# EAGLE board mowgli (EAGLE 7.6.0)
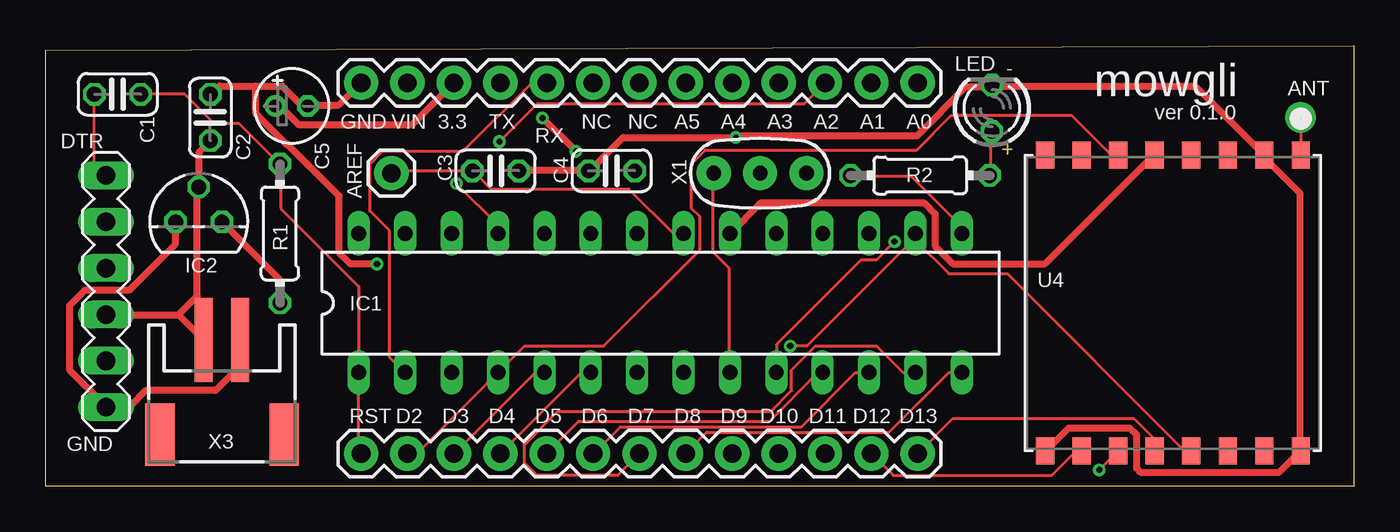
[diagram p0: board, top side]
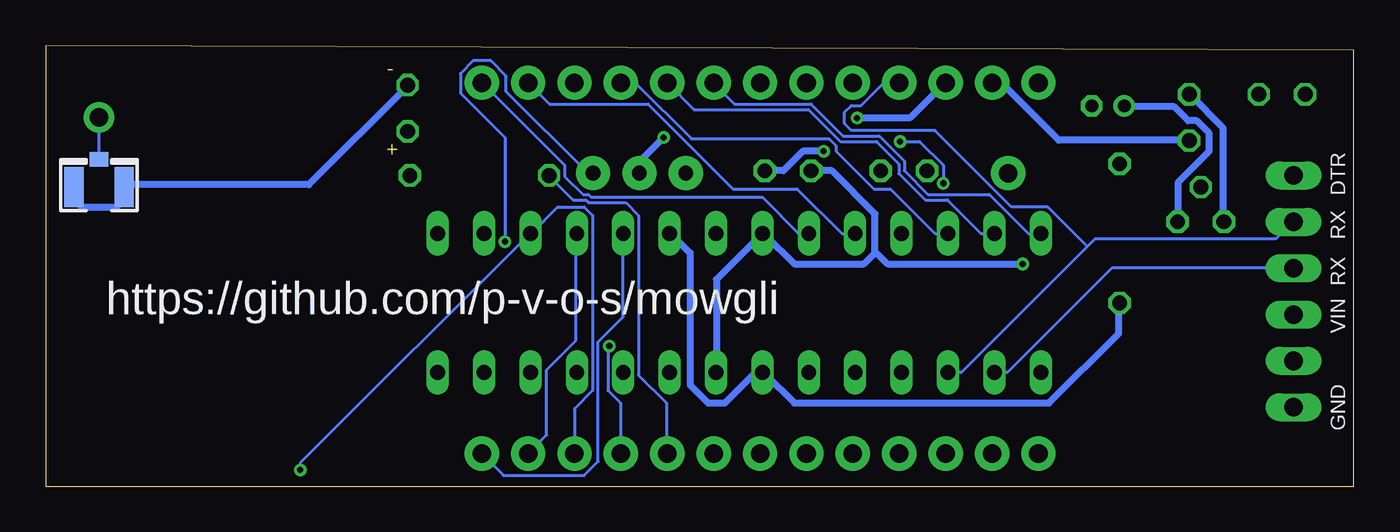
[diagram p1: board, bottom side, seen from below]

Size 71.63 x 24.13 mm. Coordinates in mm from the lower left corner, seen from the top.
Outline: 0,0 0,23.88 71.63,24.13 71.63,0 0,0
Copper layers (1*16): Top 0.0356mm / dielectric 1.5011mm / Bottom 0.0356mm
Design rules "LaenPCBOrder": minimum track width 6mil, minimum drill 13mil, track to track 6mil, track to pad 6mil, pad to pad 6mil, via to via 6mil, smd to smd 6mil, copper to edge 15mil, drill to drill 6mil, minimum pad ring 7mil, minimum via ring 7mil, stop-mask expansion 3mil, vias tented up to drill 0mil, thermal gap 10mil
Net classes: 1 power: width 0.381 mm, clearance 0.254 mm

## Footprints (pad centres in the part's own frame; a part is rotated, then mirrored left to right if it is on the bottom)
1X13 = drill 1.016 pad 1.88: 1 0,0; 2 2.54,0; 3 5.08,0; 4 7.62,0; 5 10.16,0; 6 12.7,0; 7 15.24,0; 8 17.78,0; 9 20.32,0; 10 22.86,0; 11 25.4,0; 12 27.94,0; 13 30.48,0
1X01_ROUND = drill 1 pad 1.676: 1 0,0
C025-024X044 = drill 0.813 octagon: 1 -1.27,0; 2 1.27,0
E1,8-4 = drill 0.711 pad 1.168: + -0.889,0 | drill 0.711 pad 1.168 octagon: - 0.889,0
MA06-1 = drill 1.016 long: 1 0,0; 2 2.54,0; 3 5.08,0; 4 7.62,0; 5 10.16,0; 6 12.7,0
DIL28-3 = drill 0.813 long: 1 -16.51,-3.81; 2 -13.97,-3.81; 3 -11.43,-3.81; 4 -8.89,-3.81; 5 -6.35,-3.81; 6 -3.81,-3.81; 7 -1.27,-3.81; 8 1.27,-3.81; 9 3.81,-3.81; 10 6.35,-3.81; 11 8.89,-3.81; 12 11.43,-3.81; 13 13.97,-3.81; 14 16.51,-3.81; 15 16.51,3.81; 16 13.97,3.81; 17 11.43,3.81; 18 8.89,3.81; 19 6.35,3.81; 20 3.81,3.81; 21 1.27,3.81; 22 -1.27,3.81; 23 -3.81,3.81; 24 -6.35,3.81; 25 -8.89,3.81; 26 -11.43,3.81; 27 -13.97,3.81; 28 -16.51,3.81
TO92 = drill 0.813 octagon: 1 -1.27,0; 2 0,1.905; 3 1.27,0
1X01 = drill 1.016 pad 1.88: 1 0,0
LED3MM = drill 0.813 octagon: A -1.27,0; K 1.27,0
0204/7 = drill 0.813 octagon: 1 -3.81,0; 2 3.81,0
RFMHCW_SMT = smd 1.5 x 1: 1P 8.1,-7; 2P 8.1,-5; 3P 8.1,-3; 4P 8.1,-1; 5P 8.1,1; 6P 8.1,3; 7P 8.1,5; 8P 8.1,7; 9P -8.1,7; 10P -8.1,5; 11P -8.1,3; 12P -8.1,1; 13P -8.1,-1; 14P -8.1,-3; 15P -8.1,-5; 16P -8.1,-7
RESONATOR-PTH = drill 0.8 pad 1.88: 1 -2.54,0; 2 0,0; 3 2.54,0
U.FL = smd 2.2 x 1.05: 1 0,1.375; 2 0,-1.375 | smd 0.8 x 1: 3 1.525,0
JSTPH2 = smd 1 x 4.6: 1 -1,-3.7; 2 1,-3.7 | smd 1.6 x 3.4: NC1 -3.4,1.5; NC2 3.4,1.5

## Placement (x,y rotation side)
ANALOGSIDE  M13  [1X13]  47.75,22.1 180 top
ANT  [1X01_ROUND]  68.71,20.19 0 top
C1  0.1µ  [C025-024X044]  3.94,21.46 180 top
C2  0.1µ  [C025-024X044]  9.02,20.19 90 top
C3  0.1µ  [C025-024X044]  24.64,17.27 0 top
C4  0.1µ  [C025-024X044]  30.99,17.27 180 top
C5  10µ  [E1,8-4]  13.46,20.83 0 top
DIGITALSIDE  M13  [1X13]  47.75,1.78 180 top
FTDI  FTDI  [MA06-1]  3.3,4.32 90 top
IC1  ATMEGA  [DIL28-3]  33.66,10.03 0 top
IC2  MCP1702-33  [TO92]  8.38,14.48 0 top
JP2  M01PTH  [1X01]  18.92,17.14 0 top
LED  [LED3MM]  51.82,20.7 90 top
R1  10k  [0204/7]  12.83,13.84 270 top
R2  10k  [0204/7]  47.88,17.02 180 top
U4  [RFMHCW_SMT]  61.72,10.03 90 top
X1  16 MHz  [RESONATOR-PTH]  39.12,17.14 0 top
X2  uFL  [U.FL]  68.71,16.38 90 bottom
X3  JSTPH  [JSTPH2]  9.65,4.32 180 top

## Library data of the parts
ANALOGSIDE DIGITALSIDE JP2 = SparkFun-Connectors
ANT U4 X2 X3 = microbuilder
C1-C5 R1 R2 = resistor
FTDI IC2 = JeeLabs
IC1 = atmega8
LED = led
X1 = SparkFun

## Nets
A0: ANALOGSIDE.1 IC1.23
A1: ANALOGSIDE.2 IC1.24
A2: ANALOGSIDE.3 IC1.25
A3: ANALOGSIDE.4 IC1.26
A4_SDA: ANALOGSIDE.5 IC1.27
A5_SCL: ANALOGSIDE.6 IC1.28
A6: ANALOGSIDE.7
A7: ANALOGSIDE.8
ANT: ANT.1 U4.1P X2.3
AREF: C3.1 IC1.21 JP2.1
D0_RX: ANALOGSIDE.9 FTDI.4 IC1.2
D1_TX: ANALOGSIDE.10 FTDI.5 IC1.3
D2: DIGITALSIDE.12 IC1.4 U4.6P
D3: DIGITALSIDE.11 IC1.5
D4: DIGITALSIDE.10 IC1.6
D5: DIGITALSIDE.9 IC1.11
D6: DIGITALSIDE.8 IC1.12
D7: DIGITALSIDE.7 IC1.13
D8: DIGITALSIDE.6 IC1.14
D9: DIGITALSIDE.5 IC1.15 R2.2
D10_SS: DIGITALSIDE.4 IC1.16 U4.13P
D11_MOSI: DIGITALSIDE.3 IC1.17 U4.11P
D12_MISO: DIGITALSIDE.2 IC1.18 U4.10P
D13_SCK: DIGITALSIDE.1 IC1.19 U4.12P
GND [power]: ANALOGSIDE.13 C2.2 C3.2 C4.2 C5.- FTDI.1 IC1.8 IC1.22 IC2.1 LED.K U4.2P U4.9P U4.16P X1.2 X2.1 X2.2 X3.1
N$1: IC1.9 X1.1
N$2: LED.A R2.1
N$20: C1.2 FTDI.6
N$21: IC1.10 X1.3
PWR [power]: ANALOGSIDE.12 C2.1 FTDI.3 IC2.2 X3.2
RST: C1.1 DIGITALSIDE.13 IC1.1 R1.1
VCC [power]: ANALOGSIDE.11 C4.1 C5.+ IC1.7 IC1.20 IC2.3 R1.2 U4.5P

## Tracks (layer width: path | path; a pad name or v marks a point on that pad's centre or on a via)
A0
  Bottom 0.152: IC1.23 30.4,13.84 32.38,15.82 41.76,15.82 41.91,15.98 42.22,15.98 43.2,16.97 43.2,17.58 47.7,22.07 ANALOGSIDE.1
A1
  Bottom 0.152: IC1.24 28.04,13.84 30.48,16.28 33.98,16.28 38.63,20.93 44.04,20.93 ANALOGSIDE.2
A2  (via drill 0.33)
  Top 0.152: IC1.25 24.77,14.3 v22.48,16.59 | v24.84,18.87 26.9,20.93 41.53,20.93 42.67,22.07 ANALOGSIDE.3
  Bottom 0.152: v22.48,16.59 22.48,17.58 23.77,18.87 v24.84,18.87
A3
  Bottom 0.152: IC1.26 22.94,13.84 25.38,16.28 26.29,16.28 28.35,18.34 28.35,18.64 28.73,19.02 36.27,19.02 39.32,22.07 40.08,22.07 ANALOGSIDE.4
A4_SDA
  Bottom 0.152: IC1.27 20.42,13.84 22.25,15.67 23.47,15.67 24.92,17.12 24.92,17.65 26.14,18.87 28.12,18.87 29.87,20.62 36.12,20.62 ANALOGSIDE.5
A5_SCL
  Bottom 0.152: IC1.28 17.83,13.84 19.96,15.98 23.32,15.98 24.61,17.27 24.61,17.8 25.98,19.18 27.96,19.18 29.72,20.93 33.91,20.93 35.05,22.07 ANALOGSIDE.6
ANT
  Top 0.152: U4.1P 68.73,18.19 68.73,20.17 ANT.1
  Bottom 0.152: X2.3 68.73,17.96 68.73,20.17 ANT.1
AREF
  Top 0.152: JP2.1 19.05,17.27 C3.1 23.39,17.27 24.38,16.28 31.93,16.28 34.37,13.84 IC1.21
D0_RX
  Top 0.152: ANALOGSIDE.9 27.43,22.07 26.59,22.07 22.86,18.34 18.44,18.34 17.75,17.65 17.75,15.06 18.82,14 18.82,7.06 19.66,6.22 IC1.2
  Bottom 0.152: IC1.2 18.97,6.22 13.26,11.94 FTDI.4
D1_TX
  Bottom 0.152: IC1.3 21.49,6.22 14.59,13.12 | 14.59,13.12 14.17,13.54 4.27,13.54 3.35,14.45 FTDI.5 | 14.59,13.12 16.76,15.29 18.75,15.29 22.94,19.48 27.51,19.48 27.89,19.86 27.89,20.47 27.51,20.85 26.98,20.85 25.76,22.07 24.92,22.07 ANALOGSIDE.10
D2
  Top 0.152: U4.6P 58.67,18.19 58.29,18.19 56.16,20.32 49.61,20.32 47.7,18.41 36.12,18.41 35.36,17.65 35.36,15.21 35.81,14.76 35.81,12.93 30.56,7.67 26.21,7.67 IC1.4 20.34,1.8 19.81,1.8 DIGITALSIDE.12
D3
  Top 0.152: IC1.5 26.82,6.22 22.4,1.8 DIGITALSIDE.11
D4
  Top 0.152: IC1.6 29.34,6.22 DIGITALSIDE.10
D5
  Top 0.152: IC1.11 42.29,6.22 39.62,3.56 29.18,3.56 27.43,1.8 DIGITALSIDE.9
D6
  Top 0.152: IC1.12 44.35,6.22 41.38,3.25 31.47,3.25 30.02,1.8 DIGITALSIDE.8
D7
  Top 0.152: IC1.13 46.94,6.22 45.49,7.67 42.14,7.67 40.84,6.38 40.84,5.23 39.7,4.09 28.04,4.09 26.21,2.26 26.21,1.27 26.9,0.58 31.32,0.58 DIGITALSIDE.7
D8
  Top 0.152: IC1.14 49.45,6.22 46.18,2.95 36.2,2.95 35.05,1.8 DIGITALSIDE.6
D9
  Top 0.152: R2.2 44.12,16.97 47.4,16.97 50.14,14.22 50.14,13.84 IC1.15
  Bottom 0.152: DIGITALSIDE.5 37.64,1.8 37.64,4.55 39.17,6.07 39.17,14.83 39.85,15.52 41.91,15.52 42.06,15.67 42.75,15.67 44.04,16.97 R2.2
D10_SS  (via drill 0.33)
  Top 0.152: U4.13P 62.71,1.96 62.33,1.96 52.65,11.63 49.45,11.63 47.62,13.46 IC1.16 47.62,13.39 47.4,13.39 41.68,7.67 v40.77,7.67
  Bottom 0.152: v40.77,7.67 40.84,7.59 40.84,5.23 40.16,4.55 40.16,1.8 DIGITALSIDE.4
D11_MOSI  (via drill 0.33)
  Top 0.152: v57.68,0.89 58.67,1.88 U4.11P
  Bottom 0.152: v57.68,0.89 57.68,1.27 45.11,13.84 IC1.17 45.03,13.84 43.59,15.29 42.14,15.29 41.68,14.83 41.68,5.23 42.67,4.24 DIGITALSIDE.3
D12_MISO
  Top 0.152: DIGITALSIDE.2 46.41,0.58 55.09,0.58 56.39,1.88 56.69,1.88 U4.10P
  Bottom 0.152: DIGITALSIDE.2 44.2,2.79 44.2,6.38 42.6,7.98 42.6,13.84 IC1.18
D13_SCK
  Top 0.152: DIGITALSIDE.1 49.68,3.71 59.59,3.71 60.66,2.64 60.66,1.96 U4.12P
  Bottom 0.152: IC1.19 40.01,9.27 41.38,7.9 41.38,1.35 42.14,0.58 46.56,0.58 DIGITALSIDE.1
GND  (via drill 0.33)
  Top 0.381: X3.1 10.59,7.98 10.59,6.53 9.3,5.23 5.49,5.23 4.57,4.32 FTDI.1 3.2,4.47 1.29,6.38 1.29,9.88 2.13,10.72 4.57,10.72 7.09,13.23 7.09,14.45 IC2.1 | ANALOGSIDE.13 17.22,22.07 16,20.85 14.4,20.85 C5.- 14.17,20.85 14.02,20.85 12.95,21.92 11.51,21.92 | 11.51,21.92 9.53,21.92 9.07,21.46 C2.2 | C3.2 C4.2 29.87,17.35 31.62,19.1 v37.8,19.1 37.95,19.18 47.7,19.18 50.37,21.84 51.66,21.84 LED.K 51.82,21.92 62.94,21.92 66.67,18.19 U4.2P 66.75,17.96 68.66,16.05 68.66,2.11 U4.16P 68.66,1.88 67.51,0.74 59.97,0.74 59.74,0.97 59.74,2.79 59.36,3.17 56.01,3.17 54.79,1.96 U4.9P | 11.51,21.92 11.51,20.4 13.18,18.72 13.26,18.72 16.08,15.9 16.08,12.78 16.69,12.17 v18.14,12.17
  Bottom 0.381: IC2.1 7.16,14.53 7.16,19.63 8.99,21.46 C2.2 | IC1.8 34.9,6.22 34.9,11.33 IC1.22 32.23,13.77 30.63,12.17 26.82,12.17 26.21,12.78 | C4.2 28.57,17.27 26.21,14.91 26.21,12.78 | v37.8,19.1 39.09,17.8 39.09,17.2 X1.2 | X2.1 70.03,16.36 70.03,15.67 69.65,15.29 67.74,15.29 67.36,15.67 67.36,16.36 X2.2 67.21,16.51 57.23,16.51 51.82,21.92 LED.K | v18.14,12.17 25.53,12.17 26.06,12.7 26.21,12.78
N$1
  Top 0.152: IC1.9 37.41,6.22 37.41,11.94 36.5,12.85 36.5,17.04 36.58,17.12 X1.1
N$2
  Top 0.152: R2.1 51.74,17.04 51.74,19.33 51.82,19.41 LED.A
N$20
  Top 0.152: C1.2 2.67,17.65 FTDI.6
N$21  (via drill 0.33)
  Top 0.152: IC1.10 40.01,7.75 44.65,12.39 45.49,12.39 v46.48,13.39
  Bottom 0.152: v46.48,13.39 46.48,19.1 48.92,21.54 48.92,22.61 48.23,23.29 47.24,23.29 46.41,22.45 46.41,21.61 41.99,17.2 41.68,17.2 X1.3
PWR
  Top 0.381: C2.1 8.99,18.87 8.38,18.26 IC2.2 8.31,16.2 8.31,10.41 7.39,9.5 7.31,9.35 | 7.31,9.35 3.35,9.35 FTDI.3 | 7.31,9.35 8.61,8.05 X3.2
  Bottom 0.381: ANALOGSIDE.12 19.81,22.07 19.28,22.07 16.15,18.95 9.07,18.95 C2.1
RST
  Top 0.152: DIGITALSIDE.13 17.22,1.8 17.14,1.88 IC1.1 17.14,10.95 12.88,15.21 12.88,17.65 R1.1 12.8,17.65 10.59,19.86 9.22,19.86 7.62,21.46 C1.1
VCC  (via drill 0.33)
  Top 0.381: IC2.3 12.8,11.33 12.8,10.03 R1.2 | v27.2,20.17 v29.03,18.34 | ANALOGSIDE.11 20.04,19.79 13.87,19.79 12.88,20.78 12.57,20.78 C5.+ | U4.5P 60.66,18.11 54.71,12.17 49.68,12.17 48.69,13.16 48.69,14.91 48.08,15.52 39.17,15.52 37.49,13.84 IC1.20
  Bottom 0.381: C5.+ 12.57,20.78 9.83,20.78 9.07,20.02 8.61,20.02 7.93,19.33 7.93,18.34 9.6,16.66 9.6,14.53 IC2.3 | C4.1 31.24,17.27 30.18,18.34 v29.03,18.34 | v27.2,20.17 24.31,20.17 22.4,22.07 ANALOGSIDE.11 | IC1.20 37.41,13.84 36.35,12.78 36.35,5.54 35.36,4.55 34.44,4.55 32.77,6.22 IC1.7 32.23,6.15 30.63,4.55 16.69,4.55 12.88,8.36 12.88,10.03 R1.2

## Text on the board
Dimension: - | +
tPlace: mowgli | ver 0.1.0
bPlace: https://github.com/p-v-o-s/mowgli
tNames: LED | DTR | C2 | GND | VIN | 3.3 | TX | NC | NC | A5 | A4 | A3 | A2 | A1 | A0 | C1 | C5 | AREF | C3 | RX | C4 | X1 | R2 | R1 | IC2 | IC1 | RST | D2 | D3 | D4 | D5 | D6 | D7 | D8 | D9 | D10 | D11 | D12 | D13 | X3 | GND
bNames: DTR | RX | RX | VIN | GND